# Altium PCB Sun sensor pcb (new).PCBDOC
Units mil, origin at the board's own origin, x right, y up, seen from the top; angles counter-clockwise.
Board outline 6000 x 4000 mil, 2 copper layers (Top Layer, Bottom Layer); 1 components, 0 nets, 26 pads, 0 vias.
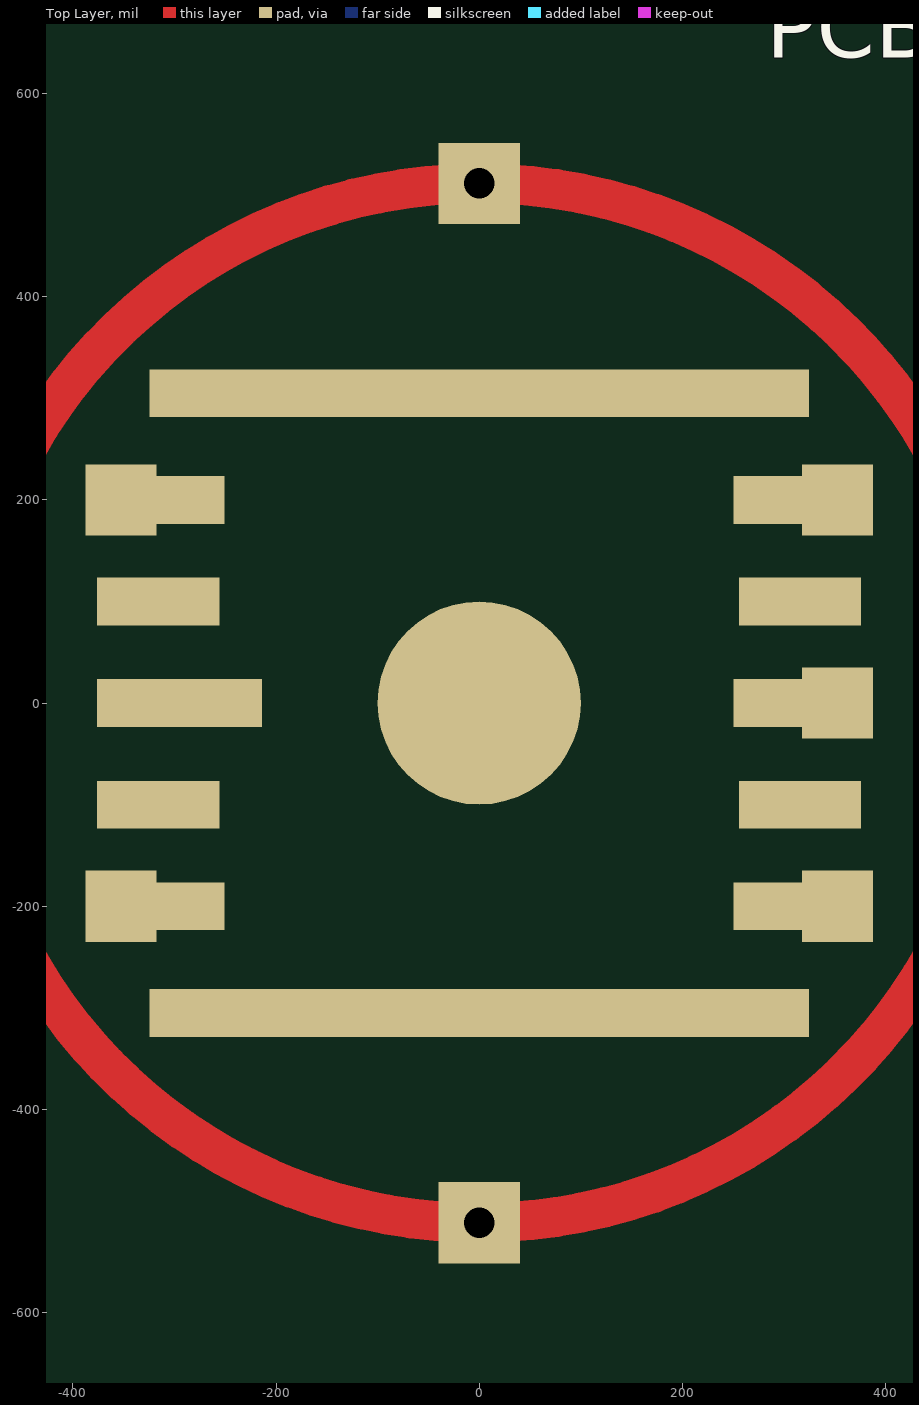
[diagram p0: Top Layer view]
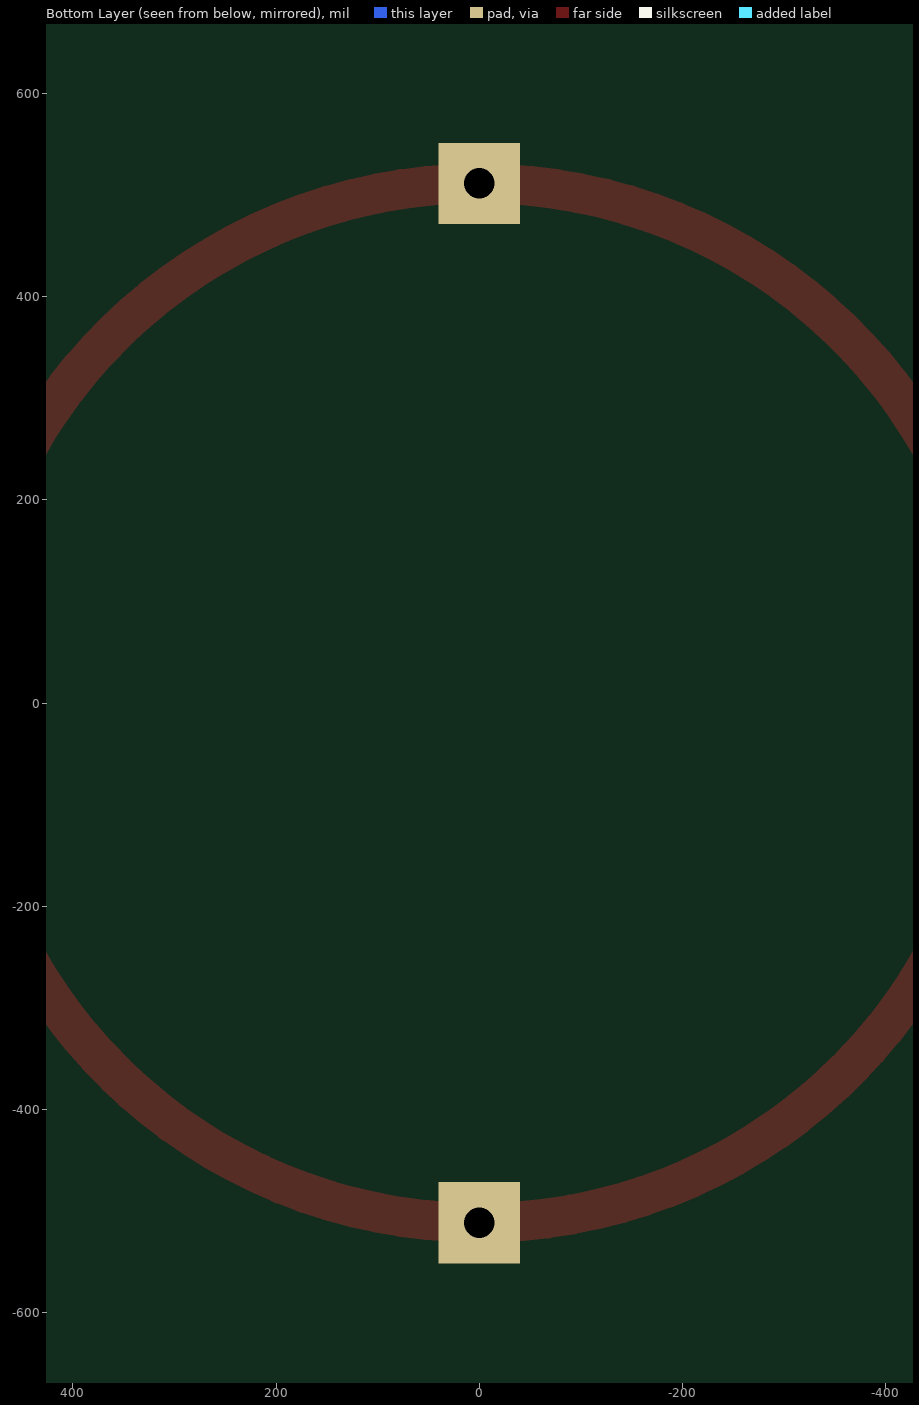
[diagram p1: Bottom Layer view, seen from below]

## Layer stack, top to bottom
Top Layer: signal copper 1.4
Dielectric: dielectric 12.6, FR-4, Dk 4.8
Bottom Layer: signal copper 1.4

## Board outline
-2052.5,-3100 3947.5,-3100 3947.5,900 -2052.5,900

## Design rules (kind name [scope] priority, off if disabled: settings)
Clearance [All] p1: gap=10
ComponentClearance [All] p1: gap=10 collisioncheckmode=0
PolygonConnect [All] p1: connectstyle=Relief reliefconductorwidth=10 reliefentries=4 polygonreliefangle="90 Angle"
RoutingLayers [All] p1: top layer=Horizontal bottom layer=Vertical
RoutingVias [All] p1: holewidth=28 width=50 viastyle="Through Hole" minholewidth=28 minwidth=50 maxholewidth=28 maxwidth=50
SolderMaskExpansion [All] p1: expansion=4
TestPointUsage [All] p1: valid=0 allowmultiple=FALSE
Testpoint [All] p1: side=15 testpointundercomponent=TRUE minsize=40 maxsize=100 preferedsize=60 minholesize=0 maxholesize=40 preferedholesize=32 testpointgrid=1 style=1023 order=-539222988
Width [All] p1: maxlimit=10 minlimit=10 preferedwidth=10
16 further rules are at their usual default settings.

## Components (designator, comment, footprint, x,y, rotation, side; value= is the part's Value field where it differs from the comment)
"PCB Top Layer" "Comment" PSD -352.5,200 r0 top

## Footprints (in the part's own frame and the unit in brackets; to place one, negate y for a bottom-side part, rotate by r counter-clockwise, add the part's x,y. Pads: shape width x height; smd on the part's side, far side on the other; paste and mask are expansions set on the pad)
PSD [mil]
  rect 70x70 smd: 1(0,0) 5(0,-400) 6(705,-400) 8(705,-200) 10(705,0)
  rect 47x47 smd: 2(0,-100) 3(0,-200) 4(0,-300) 7(705,-300) 9(705,-100)
  rect 74x47 smd: ""(60,-300) ""(60,-100) ""(65,-400) ""(65,0) ""(640,-400) ""(640,-200) ""(640,0) ""(645,-300) ""(645,-100)
  rect 117x47 smd: ""(80,-200)
  rect 114x47 on Top Solder: ""(260,-75)
  round 200 smd: ""(352.5,-200)

## Free pads (board coordinates)
  rect 80x80 hole 30: ""(0,-511.5) ""(0,511.5)
  rect 649x47 smd: ""(0,-305) ""(0,305)

## Nets (pads, with @x,y where several pads share a name; then routed paths per layer and width w, separated by ;. In a path a pad name is that pad's centre, name@x,y a point inside that pad or via, vN(x,y) a via of type N, cw(c..) or ccw(c..) an arc to the next point about the centre after c; other vN are vias at no path point)
pads on no net: "PCB Top Layer.1" "PCB Top Layer.2" "PCB Top Layer.3" "PCB Top Layer.4" "PCB Top Layer.5" "PCB Top Layer.6" "PCB Top Layer.7" "PCB Top Layer.8" "PCB Top Layer.9" "PCB Top Layer.10" "PCB Top Layer."
copper on no net: | length 3115.6
  Top Layer w39.4: -26.77,510.8 ccw(c0,0) -17.85,-511.19 ; 26.77,-510.8 ccw(c0,0) 26.77,510.8